# Altium PCB Controlador de velocidad v2.PcbDoc
Units mil, origin at the board's own origin, x right, y up, seen from the top; angles counter-clockwise.
Board outline 3346.46 x 1456.69 mil, 2 copper layers (Top Layer, Bottom Layer); 34 components, 42 nets, 134 pads, 30 vias.
Unrouted connection lines stored in the file: 1.
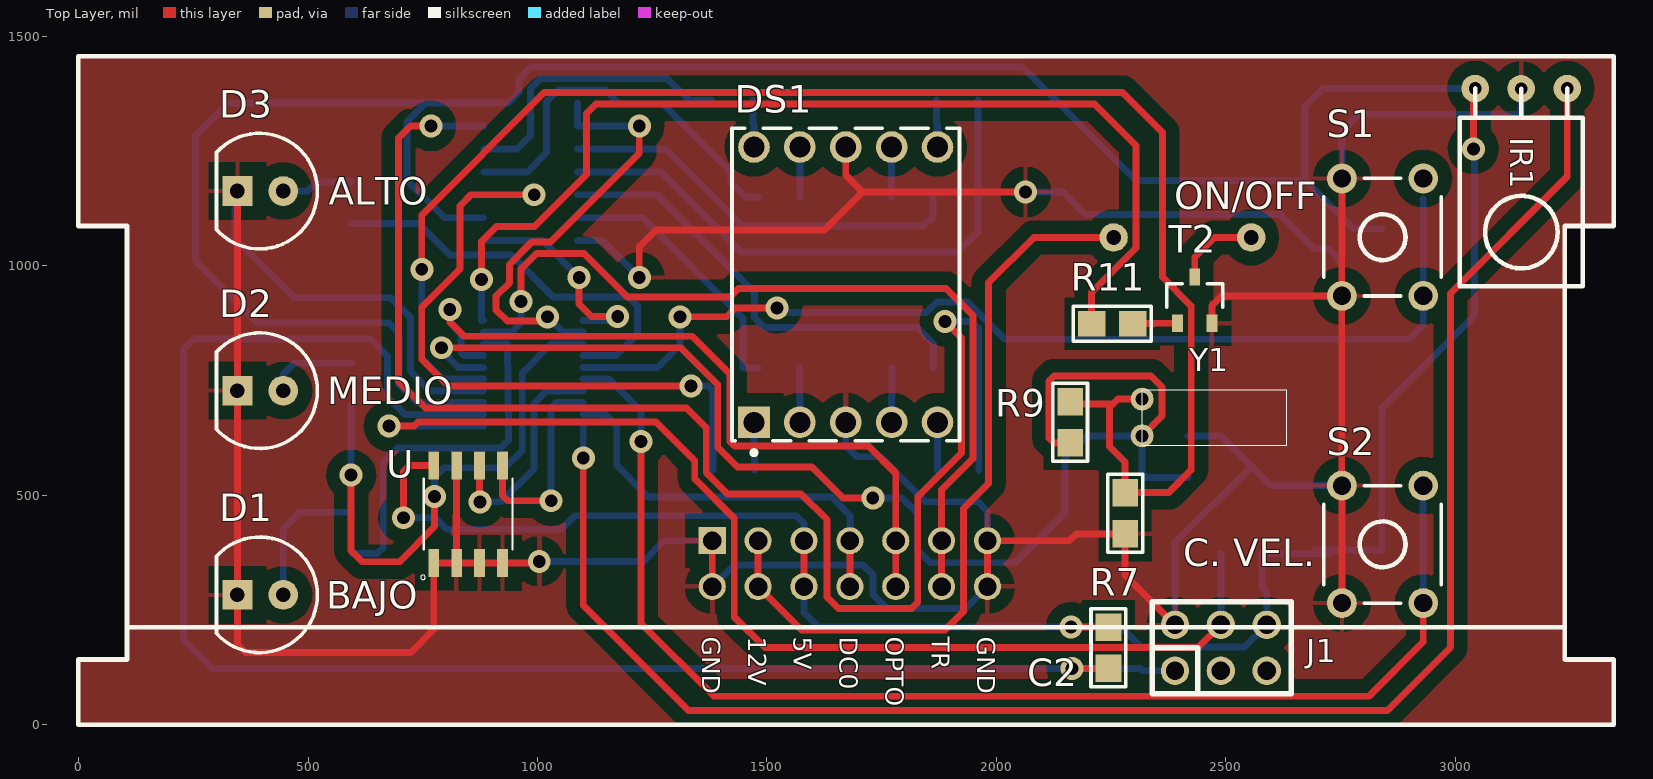
[diagram p0: Top Layer view]
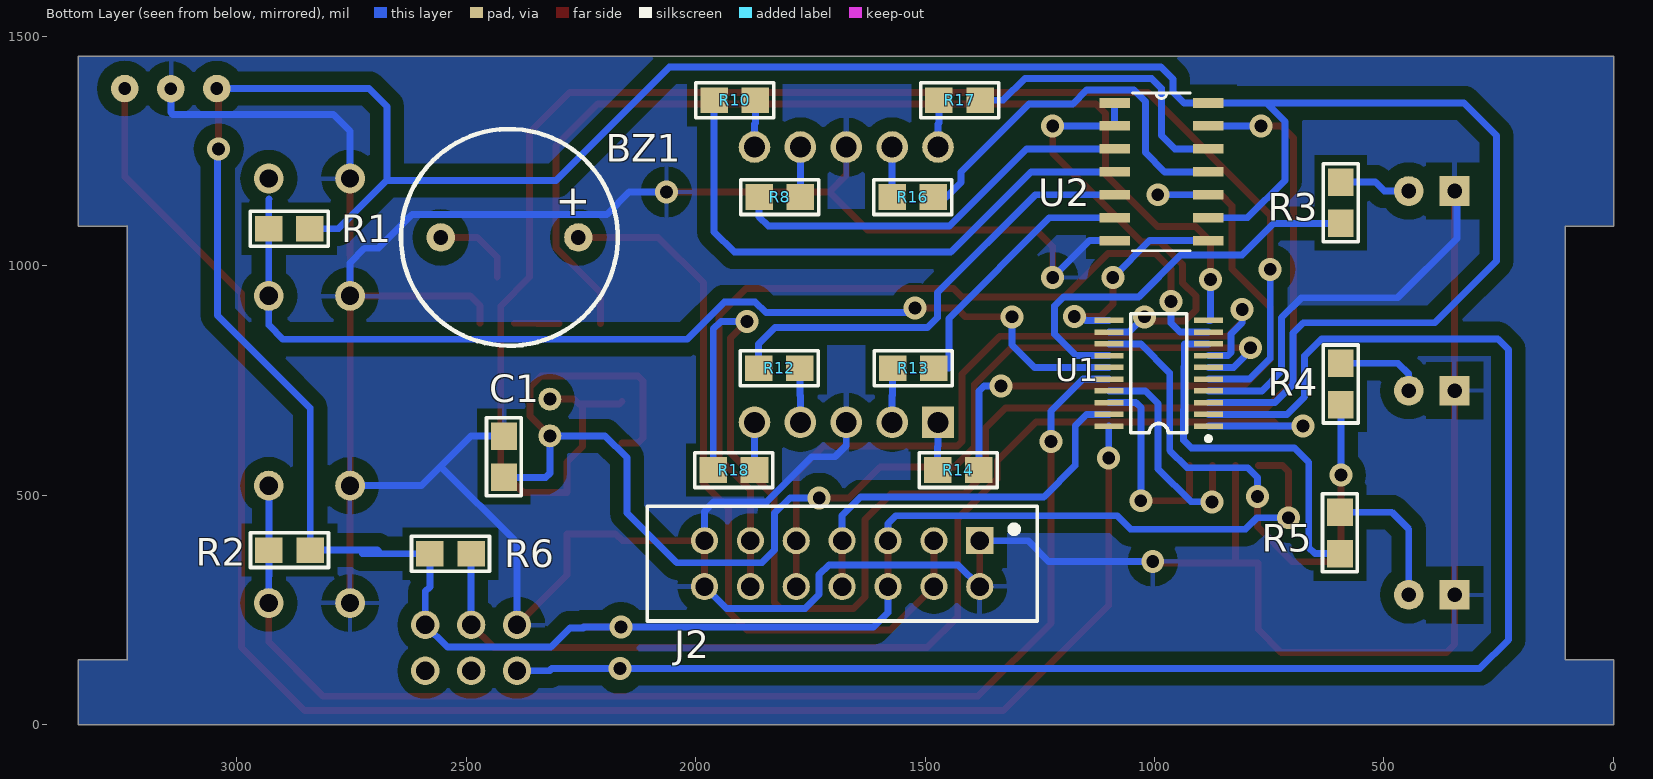
[diagram p1: Bottom Layer view, seen from below]

## Layer stack, top to bottom
Top Layer: signal copper 1.4
Dielectric: dielectric 12.6, FR-4, Dk 4.8
Bottom Layer: signal copper 1.4

## Board outline
-0.88,0.27 -0.88,142 105.42,142 105.42,1086.88 -0.88,1086.88 -0.88,1456.96 3345.57,1456.96 3345.57,1086.88 3239.27,1086.88 3239.27,142 3345.57,142 3345.57,0.27

## Design rules (kind name [scope] priority, off if disabled: settings)
Clearance GND [InPolygon] p1: gap=30
Clearance [All] p2: gap=10
PolygonConnect [All] p1: connectstyle=Relief reliefconductorwidth=10 reliefentries=4 polygonreliefangle="90 Angle"
RoutingVias [All] p1: holewidth=28 width=50 viastyle="Through Hole" minholewidth=28 minwidth=50 maxholewidth=28 maxwidth=50
SilkscreenOverComponentPads [All] p1: minsilkscreentomaskgap=10
SolderMaskExpansion [All] p1: expansion=4
TestPointUsage [All] p1: valid=0 allowmultiple=FALSE
Testpoint [All] p1: side=15 testpointundercomponent=TRUE minsize=40 maxsize=100 preferedsize=60 minholesize=0 maxholesize=40 preferedholesize=32 testpointgrid=1 style=1023 order=0123456789
Width [All] p1: maxlimit=20 minlimit=10 preferedwidth=10 toplayer_minwidth=15 toplayer_prefwidth=15 bottomlayer_minwidth=15 bottomlayer_maxwidth=15 bottomlayer_prefwidth=15 minimp=50.000000 maximp=50.000000 favimp=50.000000
23 further rules are at their usual default settings.

## Components (designator, comment, footprint, x,y, rotation, side; value= is the part's Value field where it differs from the comment)
BZ1 "BUZZER CON OSCILADOR" "BUZZER 12MM" 2405.82,1062 r0 bottom
C1 "22p" 0805 2418,584 r90 bottom
C2 "22p" 0805 2281,461 r270 top
D1 "ROJO" LED5 396,283 r180 top
D2 "AMARILLO" LED5 396,728 r180 top
D3 "VERDE" LED5 396,1163 r180 top
DS1 "HDSP-5503" H-10 1672,959 r0 top
IR1 "IRM8601S" IRM8601S 3278.01,1323.1 r180 top
J1 "BDM Port" JBDM 2389.63,117.52 r0 top
J2 "CON7*2" SIP7*2 1381,401 r0 bottom
R1 "10k" 0805 2886,1081 r180 bottom
R2 "10k" 0805 2885.37,380.48 r180 bottom
R3 "330" 0805 594.48,1137.63 r270 bottom
R4 "330" 0805 594.48,742.63 r270 bottom
R5 "330" 0805 596,418 r270 bottom
R6 "4K7" 0805 2534.63,372.52 r180 bottom
R7 "4K7" 0805 2244.63,167.52 r270 top
R8 "330" 0805 1817,1150 r180 bottom
R9 "3M" 0805 2161,659 r270 top (schematic designator R5)
R10 "330" 0805 1915,1361 r180 bottom
R11 "10K" 0805 2253,874 r0 top
R12 "330" 0805 1818,777 r180 bottom
R13 "330" 0805 1526,777 r0 bottom
R14 "330" 0805 1428,555 r0 bottom
R16 "330" 0805 1527,1150 r0 bottom
R17 "330" 0805 1425,1361 r0 bottom
R18 "330" 0805 1917,555 r180 bottom
S1 "ON/OFF" TACTSWITCH 2842.1,1062.52 r0 top
S2 "CV" TACTSWITCH 2842.1,393 r0 top
T2 "BC817" SOT23 2395.2,875 r0 top
U "24C64" SOIC127P600X175-8N 849,459 r90 top
U1 "MC9S08SH4 (TSSOP20)" TSSOP20 991,766 r90 bottom
U2 "74HC164D" SOIC127P600X175-14N 985,1205 r180 bottom (schematic designator U1)
Y1 "32.768 KHz" X32768 2318,629 r90 top

## Footprints (in the part's own frame and the unit in brackets; to place one, negate y for a bottom-side part, rotate by r counter-clockwise, add the part's x,y. Pads: shape width x height; smd on the part's side, far side on the other; paste and mask are expansions set on the pad)
0805 [mil] "Pasivo 0805"
  rect 60x56 smd: 1(-45,0) 2(45,0)
  silkscreen extent -85,-38 85,38, body extent -40,-25 39,25, height 15
"BUZZER 12MM" [mil]
  round 62 hole 32: 1(-150,0) 2(150,0)
  silkscreen extent -236,-236 237,236, body extent -368,-236 240,236, height 380
H-10 [mil] "LED, 7-Segment Display, 14.22 mm, RHD; 10 Leads; Row Space 15.24 mm; Pitch 2.54 mm"
  rect 69x69 hole 45.5: 1(-200,-300)
  round 69 hole 45.5: 2(-100,-300) 3(0,-300) 4(100,-300) 5(200,-300) 6(200,300) 7(100,300) 8(0,300) 9(-100,300) 10(-200,300)
  silkscreen extent -248,-371 248,341
IRM8601S [mil]
  round 60 hole 27.56: 1(33.46,-63.39) 2(133.86,-62.99) 3(234.25,-63.39)
  silkscreen extent 0,-63 268,367
JBDM [mil]
  round 62 hole 40: 1(0,0) 2(0,100) 3(100,0) 4(100,100) 5(200,0) 6(200,100)
  silkscreen extent -50,-50 253,150
LED5 [mil]
  round 65 hole 32: 1(-50,0)
  rect 65x65 hole 32: 2(50,0)
  silkscreen extent -124,-126 96,126, body extent -117,-117 97,120, height 485
SIP7*2 [mm]
  rect 1.5x1.5 hole 1.016: 1(0,0)
  round 1.5 hole 1.016: 2(0,2.54) 3(2.54,0) 4(2.54,2.54) 5(5.08,0) 6(5.08,2.54) 7(7.62,0) 8(7.62,2.54) 9(10.16,0) 10(10.16,2.54) 11(12.7,0) 12(12.7,2.54) 13(15.24,0) 14(15.24,2.54)
  silkscreen extent -3.17,-1.91 18.41,4.44, body extent -1.26,-1.3 16.52,3.78, height 10.1
SOIC127P600X175-8N [mm]
  rect 1.55x0.6 smd: 1(-2.7,1.905) 2(-2.7,0.635) 3(-2.7,-0.635) 4(-2.7,-1.905) 5(2.7,-1.905) 6(2.7,-0.635) 7(2.7,0.635) 8(2.7,1.905)
  silkscreen extent -3.63,-2.45 1.95,2.63
SOIC127P600X175-14N [mil]
  rect 67x21 smd: 1(-102,150) 2(-102,100) 3(-102,50) 4(-102,0) 5(-102,-50) 6(-102,-100) 7(-102,-150) 8(102,-150) 9(102,-100) 10(102,-50) 11(102,0) 12(102,50) 13(102,100) 14(102,150)
  silkscreen extent -63,-172 63,172
SOT23 [mm]
  rect 0.6x0.95 smd: 1(0,0) 2(0.95,2.55) 3(1.9,0)
  silkscreen extent -0.6,0.87 2.5,2.18, body extent -0.53,-0.25 2.47,2.88, height 1
TACTSWITCH [mil]
  round 65 hole 40: 1(-88.58,-127.95) 1(-88.58,127.95) 2(88.58,-127.95) 2(88.58,127.95)
  silkscreen extent -128,-128 128,128, body extent -120,-156 124,156, height 276
TSSOP20 [mm]
  rect 0.3x1.6 smd: 1(-2.925,-2.75) 2(-2.275,-2.75) 3(-1.625,-2.75) 4(-0.975,-2.75) 5(-0.325,-2.75) 6(0.325,-2.75) 7(0.975,-2.75) 8(1.625,-2.75) 9(2.275,-2.75) 10(2.925,-2.75) 11(2.925,2.75) 12(2.275,2.75) 13(1.625,2.75) 14(0.975,2.75) 15(0.325,2.75) 16(-0.325,2.75) 17(-0.975,2.75) 18(-1.625,2.75) 19(-2.275,2.75) 20(-2.925,2.75)
  silkscreen extent -3.75,-2.87 3.3,1.55
X32768 [mil]
  round 50 hole 28: 1(80.5,0) 2(0.5,0)
  silkscreen extent -20,-315 101,0

## Part data
BZ1: library part BUZZER
C1 C2: library part CAP
D1 D2 D3: library part LED
DS1: "14.22 mm Gray Surface HER 7-Segment Display: CC, RH DP"
IR1: "Sensor IR"
J1: library part JBDM
R1 R2 R3 R4 R5 R6 R7 R8 R9 R10 R11 R12 R13 R14 R16 R17 R18: library part RES
S1 S2: library part "TACT SWITCH"
T2: library part "TRANSISTOR NPN"
U: library part AT24C256C-SSHL-T, "EEPROM Memory IC 256Kb _32K x 8_ I²C 1MHz 550ns 8-SOIC"
U1: library part MC9S08SH8_20
U2: library part 74HC164D,653, "Shift Shift Register 1 Element 8 Bit 14-SO"
Y1: library part CRYSTAL

## Via types
v1: diameter 50, hole 28, Top Layer to Bottom Layer, 30 vias

## Nets (pads, with @x,y where several pads share a name; then routed paths per layer and width w, separated by ;. In a path a pad name is that pad's centre, name@x,y a point inside that pad or via, vN(x,y) a via of type N, cw(c..) or ccw(c..) an arc to the next point about the centre after c; other vN are vias at no path point)
5V: IR1.3 J1.6 J2.5 J2.6 R1.2 R2.2 R6.1 R7.1 U1.3 U2.9 U2.14 U.8 | length 8931.4
  Top Layer w15: v1(708,451) 708,552 721.3,565.3 U.8 ; J2.6 J2.5 ; v1(2163,212.52) R7.1 ; v1(3040,1255) 3040,1382.73 IR1.3
  Bottom Layer w15: v1(708,451) 777,451 802,426 1052.53,426 1081.92,455.38 1563.62,455.38 1581,438 J2.5 ; U1.3 737.76,702.02 698,741.79 698,854 676,876 390,876 255,1011 255,1284 326,1355 756,1355 ; U2.9 797,1105 716,1186 716,1315 756,1355 ; J2.6 1581,244 1612.48,212.52 v1(2163,212.52) 2244.64,212.52 2244.64,211 2274,211 2316,169 2541.11,169 J1.6 2589.64,290 2579.64,300 R6.1 2726,372.52 ; 2673,1186 2305,1186 2057.72,1433.28 986.28,1433.28 960,1407 960,1379 936,1355 U2.14 ; 2686,372.52 2693.95,380.48 R2.2 2840.37,690.37 3042,892 3042,1244 v1@3034,1252 ; R1.2 2779,1081 2673,1187 2673,1209 2673,1347 2712.49,1386.49 IR1.3 ; 756,1355 U2.14 ; 756,1355 U2.14
12V: BZ1.1 J2.3 J2.4 | length 1656.5
  Top Layer w15: J2.3 J2.4 1576,206 1888,206 1929,247 1929,471 1983.54,525.54 1983.54,963.54 2082,1062 BZ1.1
A4: J1.1 R7.2 U1.2 | length 3685
  Top Layer w15: v1(2165,122.52) R7.2
  Bottom Layer w15: U1.2 711.2,676.43 673,714.63 673,804 636,841 252,841 229,818 229,185 291.48,122.52 v1(2165,122.52) 2314,122.52 2319,117.52 J1.1
A5: J1.4 R6.2 U1.1 | length 2551.6
  Top Layer w15: v1(676.16,650.84) 730.84,650.84 739.5,659.5 1258.5,659.5 1343,575 1343,535.77 1429,449.77 1429,235 1496.11,167.89 2440,167.89 J1.4
  Bottom Layer w15: v1(676.16,650.84) U1.1 ; J1.4 R6.2
B6: C1.1 R9.2 U1.6 Y1.2 | length 2890.4
  Top Layer w15: v1(791,821.5) 1312.59,821.5 1393,741.09 1393,605 1436,562 1598,562 1666,494 v1(1731,494) ; R9.2 2126,614 2115,625 2115,749 2126,760 2337,760 2361,736 2361,672.5 Y1.2
  Bottom Layer w15: v1(791,821.5) 791,815.36 827.56,778.8 U1.6 ; v1(1731,494) 1795,494 1828.03,460.97 1828.03,380.97 1856,353 2041.5,353 2149.97,461.47 2149.97,581.97 2197.5,629.5 Y1.2 2318,548 2327,539 C1.1
B7: C2.1 R9.1 U1.5 Y1.1 | length 3523.3
  Top Layer w15: v1(748,992.5) 748,1111 1014.5,1377.5 2275.5,1377.5 2362,1291 2362,976 2425,913 2425,555 2376,506 C2.1 2281,572 2247,606 2247,699 ; R9.1 2166,699 2247,699 ; Y1.1 2265.5,709.5 2255,699 2247,699
  Bottom Layer w15: v1(748,992.5) 748,798.16 792.96,753.2 U1.5
BUZZER: R11.1 U1.10 | length 2271.2
  Top Layer w15: v1(878,970) 878,1053 911,1086 994,1086 1107,1199 1107,1332 1127.5,1352.5 2214.5,1352.5 2305,1262 2305,1039 2208,942 R11.1
  Bottom Layer w15: v1(878,970) 878,881.16 U1.10
CLOCK: U1.11 U2.8 | length 457.7
  Top Layer w15: v1(1091,975) 1091,917 1118,890 v1(1175,890)
  Bottom Layer w15: U2.8 1011,1055 v1(1091,975) ; U1.11 1150.16,881.16 v1@1159,890
CV: R2.1 S2.2 U1.16 | length 2748.6
  Top Layer w15: v1(1226,617) 1226,221 1385,62 2813,62 2930.68,179.68 S2.2@2930.68,265
  Bottom Layer w15: U1.16 1156,753.2 1226,683.2 v1(1226,617) ; S2.2@2930.37,490.95 R2.1 2930.37,324.32 2930.68,324 S2.2@2930.68,265.05
DATA: U1.12 U2.1 U2.2 | length 956.1
  Top Layer w15: v1(1022,889) 1012.5,879.5 934.5,879.5 910,904 910,934 939,963 939,1003.36 987.64,1052 1028,1052 1222,1246 v1(1222,1305)
  Bottom Layer w15: v1(1022,889) 1055.43,855.57 U1.12 ; U2.1 U2.2 v1(1222,1305)
DC0: J2.7 J2.8 U1.19 | length 879
  Top Layer w15: J2.8 J2.7
  Bottom Layer w15: U1.19 1148,676.43 1173,651.43 1173,564.5 1241.5,496 1641,496 1681,456 J2.7
GND: C1.2 C2.2 D1.2 D2.2 D3.2 DS1.3 DS1.8 IR1.2 J1.2 J2.1 J2.2 J2.13 J2.14 S1.1 S2.1 T2.3 U1.4 U2.7 U.1 U.2 U.3 U.4 U.7 | length 9913.9
  Top Layer w15: D3.2 346,243 346,175 364,157 724,157 774,207 U.1 U.2 ; U.7 U.2 ; v1@1000.7,352.7 U.4 U.3 U.2 ; v1(1222,975) 1222,1042 1258,1078 1626,1078 1709,1161 ; J2.2 J2.1 ; DS1.8 1672,1198 1709,1161 ; J2.14 J2.13 2160,401 2175,416 C2.2 2281,326.16 J1.2 ; v1(2064,1161) 1709,1161 ; T2.3 2470,914 2490.57,934.57 2719.57,934.57 ; 2753,968 2753,1023.39 ; S2.1@2753.52,265.05 2753.52,490.44 2753,490.95 2753,524.42 2753,1023.39 ; S1.1@2753.52,1190.47 2753.52,1023.9 ; 2753,1023.39 2753.52,1023.9 ; 2753,1023.39 2753.52,1023.9
  Bottom Layer w15: D3.2@341,1163 341,1060 470.5,930.5 679.5,930.5 723,887 723,770.61 766,727.61 U1.4 ; v1(1004,356) 1231,356 1276,401 J2.1 ; U2.7 1142,1055 v1(1222,975) ; J2.2 1428.03,348.03 1709.97,348.03 1731,327 1731,283.5 1761.5,253 1933,253 J2.14 ; DS1.3 1672,608 1696,584 1747,584 1845,486 1960,486 1981,465 J2.13 ; v1(2064,1161) 2145,1161 2194,1112 2618,1112 2691.5,1038.5 2721.5,1038.5 2753.52,1006.48 S1.1@2753.52,934.57 ; J1.2 2389.64,365 2389.64,396.64 2556,563 ; C1.2 2490,629 2598.05,520.95 S2.1@2753.52,520.95 ; S1.1@2753.52,1190.47 2753.52,1293.52 2790,1330 3140,1330 3144.16,1334.16 IR1.2
NetBZ1_2: BZ1.2 T2.2 | length 184.4
  Top Layer w15: T2.2 2432.6,1018.6 2476,1062 BZ1.2
NetD1_1: D1.1 R5.1 | length 308.3
  Bottom Layer w15: D1.1 446,426 483,463 R5.1
NetD2_1: D2.1 R4.1 | length 194.3
  Bottom Layer w15: D2.1 446,764 469.63,787.63 R4.1
NetD3_1: D3.1 R3.1 | length 156.6
  Bottom Layer w15: D3.1 499.37,1163 519.01,1182.63 R3.1
NetDS1_1: DS1.1 R14.2 | length 104.4
  Bottom Layer w15: DS1.1 1472,607 1473,606 R14.2
NetDS1_2: DS1.2 R13.2 | length 118.4
  Bottom Layer w15: R13.2 1571,718 1572,717 DS1.2
NetDS1_4: DS1.4 R12.2 | length 118.4
  Bottom Layer w15: DS1.4 1772,717 1773,718 R12.2
NetDS1_5: DS1.5 R18.2 | length 104
  Bottom Layer w15: R18.2 DS1.5
NetDS1_6: DS1.6 R10.2 | length 102.8
  Bottom Layer w15: R10.2 1870,1311 1872,1309 DS1.6
NetDS1_7: DS1.7 R8.2 | length 109
  Bottom Layer w15: R8.2 DS1.7
NetDS1_9: DS1.9 R16.2 | length 109
  Bottom Layer w15: R16.2 DS1.9
NetDS1_10: DS1.10 R17.2 | length 102.8
  Bottom Layer w15: R17.2 1470,1311 1472,1309 DS1.10
NetR8_1: R8.1 U2.3 | length 895.9
  Bottom Layer w15: U2.3 1279,1255 1447,1087 1842,1087 1862,1107 R8.1
NetR10_1: R10.1 U2.4 | length 1250.7
  Bottom Layer w15: U2.4 1269.13,1205 1444.13,1030 1916,1030 1960,1074 R10.1
NetR11_2: R11.2 T2.1 | length 97.6
  Top Layer w15: R11.2 2346,874 2347,875 T2.1
NetR12_1: R12.1 U2.5 | length 995.6
  Bottom Layer w15: U2.5 1260,1155 1473.39,941.61 1473.39,887 1495.07,865.32 1827.68,865.32 1863,830 R12.1
NetR13_1: R13.1 U2.6 | length 593.5
  Bottom Layer w15: U2.6 1229,1105 1448.39,885.61 1448.39,777 R13.1
NetR14_1: R14.1 U2.10 | length 1486.9
  Top Layer w15: v1(993,1155) 855,1155 831,1131 831,993 748,910 748,796 806,738 v1(1335,738)
  Bottom Layer w15: U2.10 v1(993,1155) ; v1(1335,738) 1372,738 1383,727 R14.1
NetR16_1: R16.1 U2.11 | length 847.6
  Bottom Layer w15: U2.11 977.84,1205 1019.84,1247 1019.84,1357.84 1045,1383 1148.22,1383 1178.32,1352.9 1274.1,1352.9 1422,1205 1422,1182 1454,1150 R16.1
NetR17_1: R17.1 U2.12 | length 640.4
  Bottom Layer w15: U2.12 956,1255 985,1284 985,1387 1006.28,1408.28 1282.72,1408.28 1330,1361 R17.1
NetR18_1: R18.1 U2.13 | length 3280
  Top Layer w15: v1(768,1305) 723.5,1305 697.5,1279 697.5,748.5 756,690 1325,690 1368,647 1368,549 1414,503 1575,503 1631,447 1631,278 1656,253 1815,253 1829,267 1829,497 1924,592 1924,843 v1(1888,879)
  Bottom Layer w15: v1(768,1305) U2.13 ; v1(1888,879) 1945,879 1962,862 R18.1
ON/OFF: R1.1 S1.2 U1.15 | length 2255.9
  Top Layer w15: v1(1311,889) 1412,889 1431,908 v1(1522,908)
  Bottom Layer w15: U1.15 1261.8,778.8 1311,828 v1(1311,889) ; v1(1522,908) 1532,898 1846.9,898 1870.4,921.5 1937.86,921.5 2019.36,840 2900,840 2930.68,870.68 2930.68,1145.16 2930.37,1145.48
OPTO: J2.9 J2.10 U1.7 | length 1625
  Top Layer w15: v1(809,905) 809,878 840.5,846.5 1337.5,846.5 1420,764 1420,617 1430,607 1722,607 1781,548 J2.9 J2.10
  Bottom Layer w15: v1(809,905) 809,876 833.5,851.5 833.5,810.89 840,804.39 U1.7
RX: IR1.1 U1.20 | length 3757.1
  Top Layer w15: v1(1100,581) 1100,260 1329,31 2853,31 2990,168 2990,940 3244.55,1194.55 IR1.1
  Bottom Layer w15: U1.20 1100,650.84 v1(1100,581)
SCL: U1.17 U.6 | length 487.5
  Top Layer w15: U.6 874,486 v1(875,485)
  Bottom Layer w15: v1@876,486 921,486 992.46,557.46 992.46,699.84 1020.23,727.61 U1.17
SDA: U1.18 U.5 | length 453.1
  Top Layer w15: U.5 924,500 936,488 v1(1030,488)
  Bottom Layer w15: v1(1030,488) 1030,691 1041.02,702.02 U1.18
TR: J2.11 J2.12 U1.9 | length 1996.5
  Top Layer w15: v1(964,922) 964,993 998,1027 1101.5,1027 1196,932.5 1420.14,932.5 1438.14,950.5 1890.72,950.5 1949,892.22 1949,580 1881,512 J2.11 ; J2.11 J2.12 J2.11
  Bottom Layer w15: U1.9 944.57,855.57 964,875 v1(964,922)
"USO ALTO": R5.2 U1.8 | length 814.4
  Bottom Layer w15: R5.2 650.7,373 664,386.3 664,572 695,603 920,603 937,620 937,642.35 935.02,829.98 U1.8
"USO BAJO": R3.2 U1.14 | length 898
  Bottom Layer w15: R3.2 740.37,1092.63 809,1024 943,1024 1034.5,932.5 1198.5,932.5 1218,913 1218,851 1171.39,804.39 U1.14
"USO MEDIO": R4.2 U1.13 | length 1191.9
  Top Layer w15: v1(594,544) 594,380 619,355 699,355 776,432 v1(776,497)
  Bottom Layer w15: v1(594,544) 594,697.16 R4.2 ; v1(776,497) 776,539 797,560 929,560 967,598 967,767 1029.98,829.98 U1.13
pads on no net: J1.3 J1.5

## Polygon pours and split planes (outlines as drawn)
GND on Top Layer "Bottom Layer-No Net" (solid, remove dead copper, pour order 1000): 0,1456 3345,1456 3345,1088 3239,1088 3240,1087 3240,143 3346,143 3346,0 0,0 0,142 1,143 105,143 105,1086 103,1088 0,1088 0,1456
GND on Bottom Layer "Bottom Layer-No Net" (solid, remove dead copper, pour order 1001): 0,1456 3345,1456 3345,1088 3239,1088 3240,1087 3240,143 3346,143 3346,0 0,0 0,142 1,143 105,143 105,1086 103,1088 0,1088 0,1456

## Silkscreen, mask and mechanical layers (free items; w line width, h text height)
Top Overlay:
  lines w10: 105,212 3238,212 ; -0.88,0.27 3345.57,0.27 3345.57,142 3239.27,142 3239.27,1086.88 3345.57,1086.88 3345.57,1456.96 -0.88,1456.96 -0.88,1086.88 105.42,1086.88 105.42,142 -0.88,142 -0.88,0.27
  text "ALTO" at 544.71,1133.01 h60
  text "ON/OFF" at 2388,1123 h60
  text "MEDIO" at 541.57,698.01 h60
  text "C. VEL." at 2408,345 h60
  text "BAJO" at 540,253.01 h60
  text "GND" at 1359.01,191.87 h40 r270
  text "12V" at 1459.01,191.87 h40 r270
  text "5V" at 1559.01,191.87 h40 r270
  text "DC0" at 1659.01,191.87 h40 r270
  text "OPTO" at 1759.01,191.87 h40 r270
  text "TR" at 1859.01,191.87 h40 r270
  text "GND" at 1959.01,191.87 h40 r270

## Text inside footprints (layer, text, board x,y; h text height)
BZ1: Bottom Overlay "+" at 2228.65,1168.3 h66.93 r180